# Altium PCB USBINFRTransiever.PcbDoc
Units mm, origin at the board's own origin, x right, y up, seen from the top; angles counter-clockwise.
Board outline 50 x 41 mm, 2 copper layers (Top Signal Layer, Bottom Signal Layer), stack 1.571 mm thick; 49 components, 29 nets, 145 pads, 55 vias.
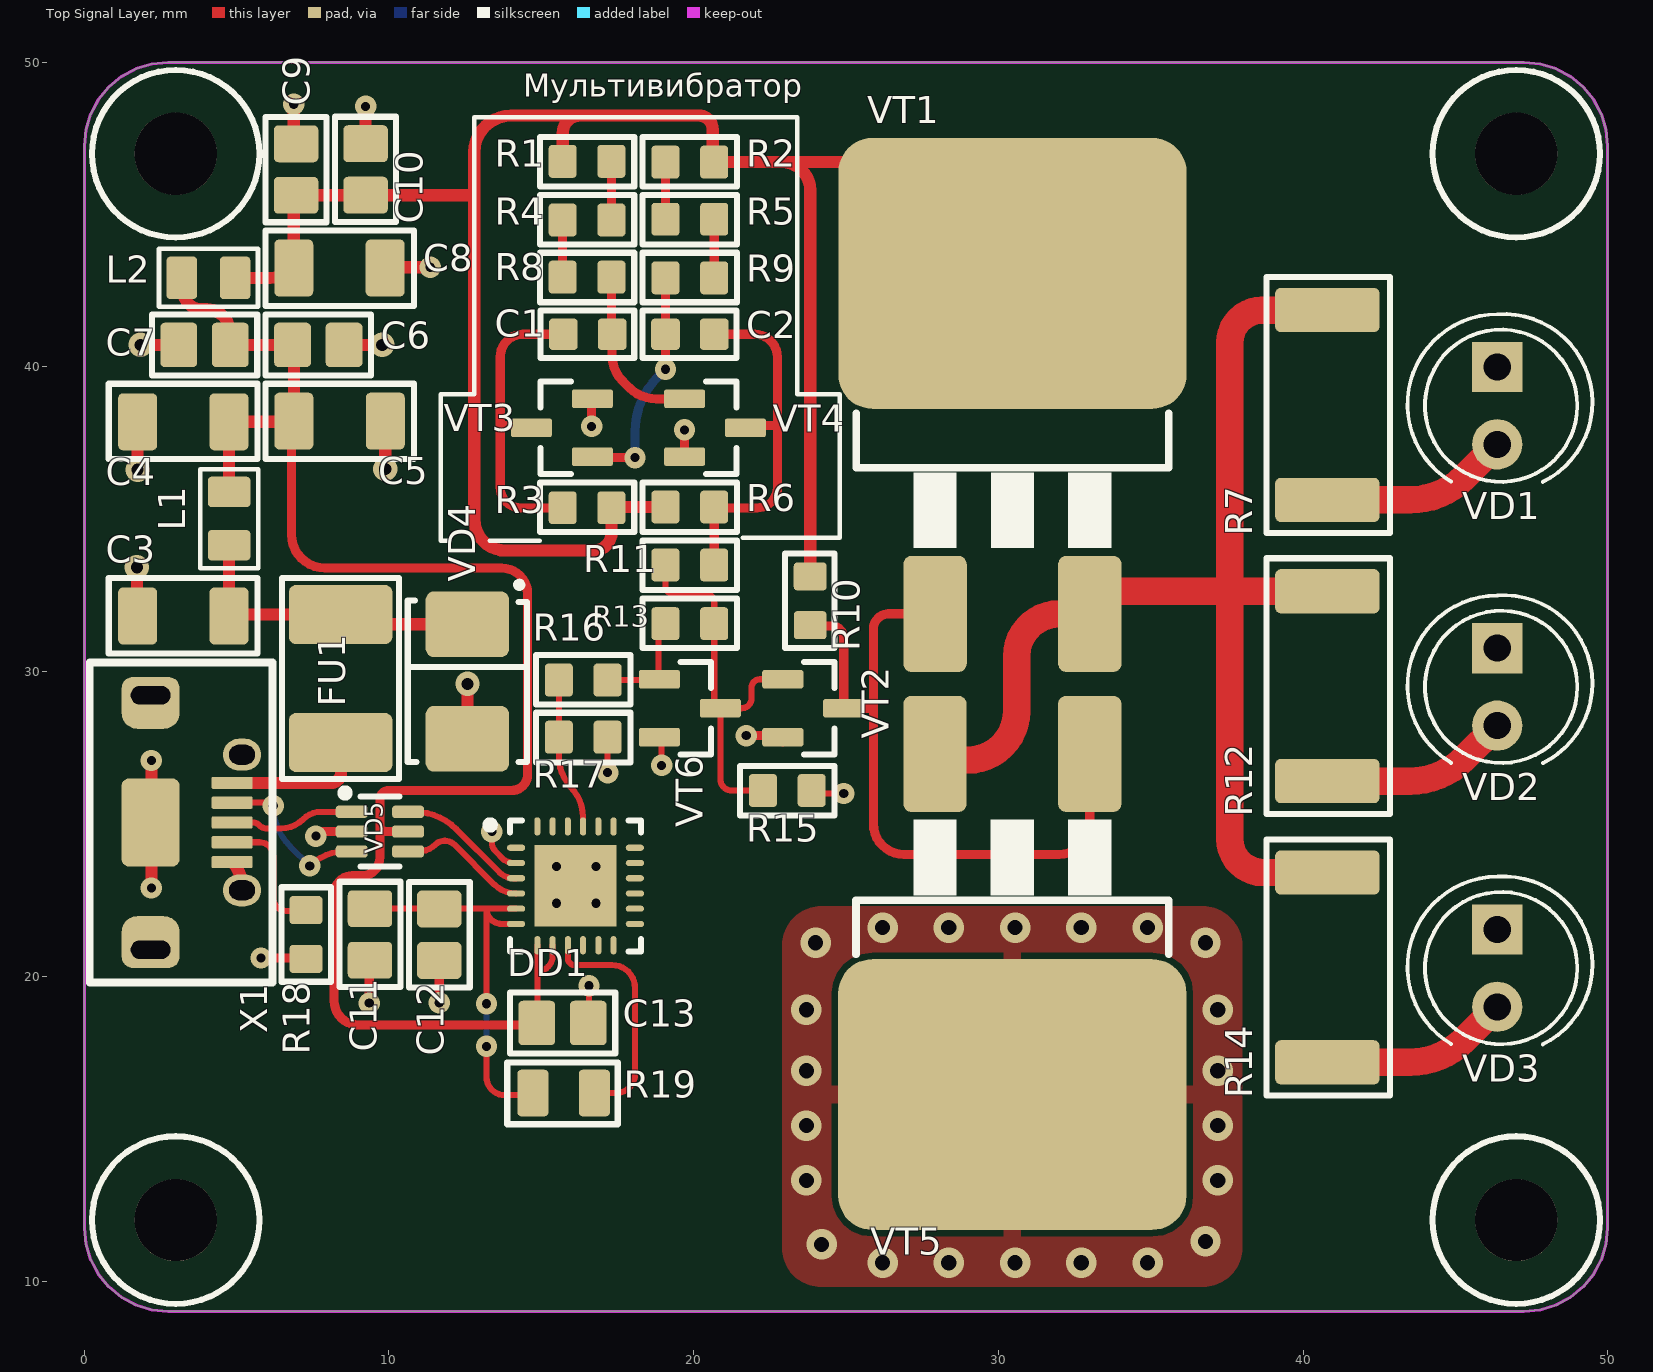
[diagram p0: Top Signal Layer view]
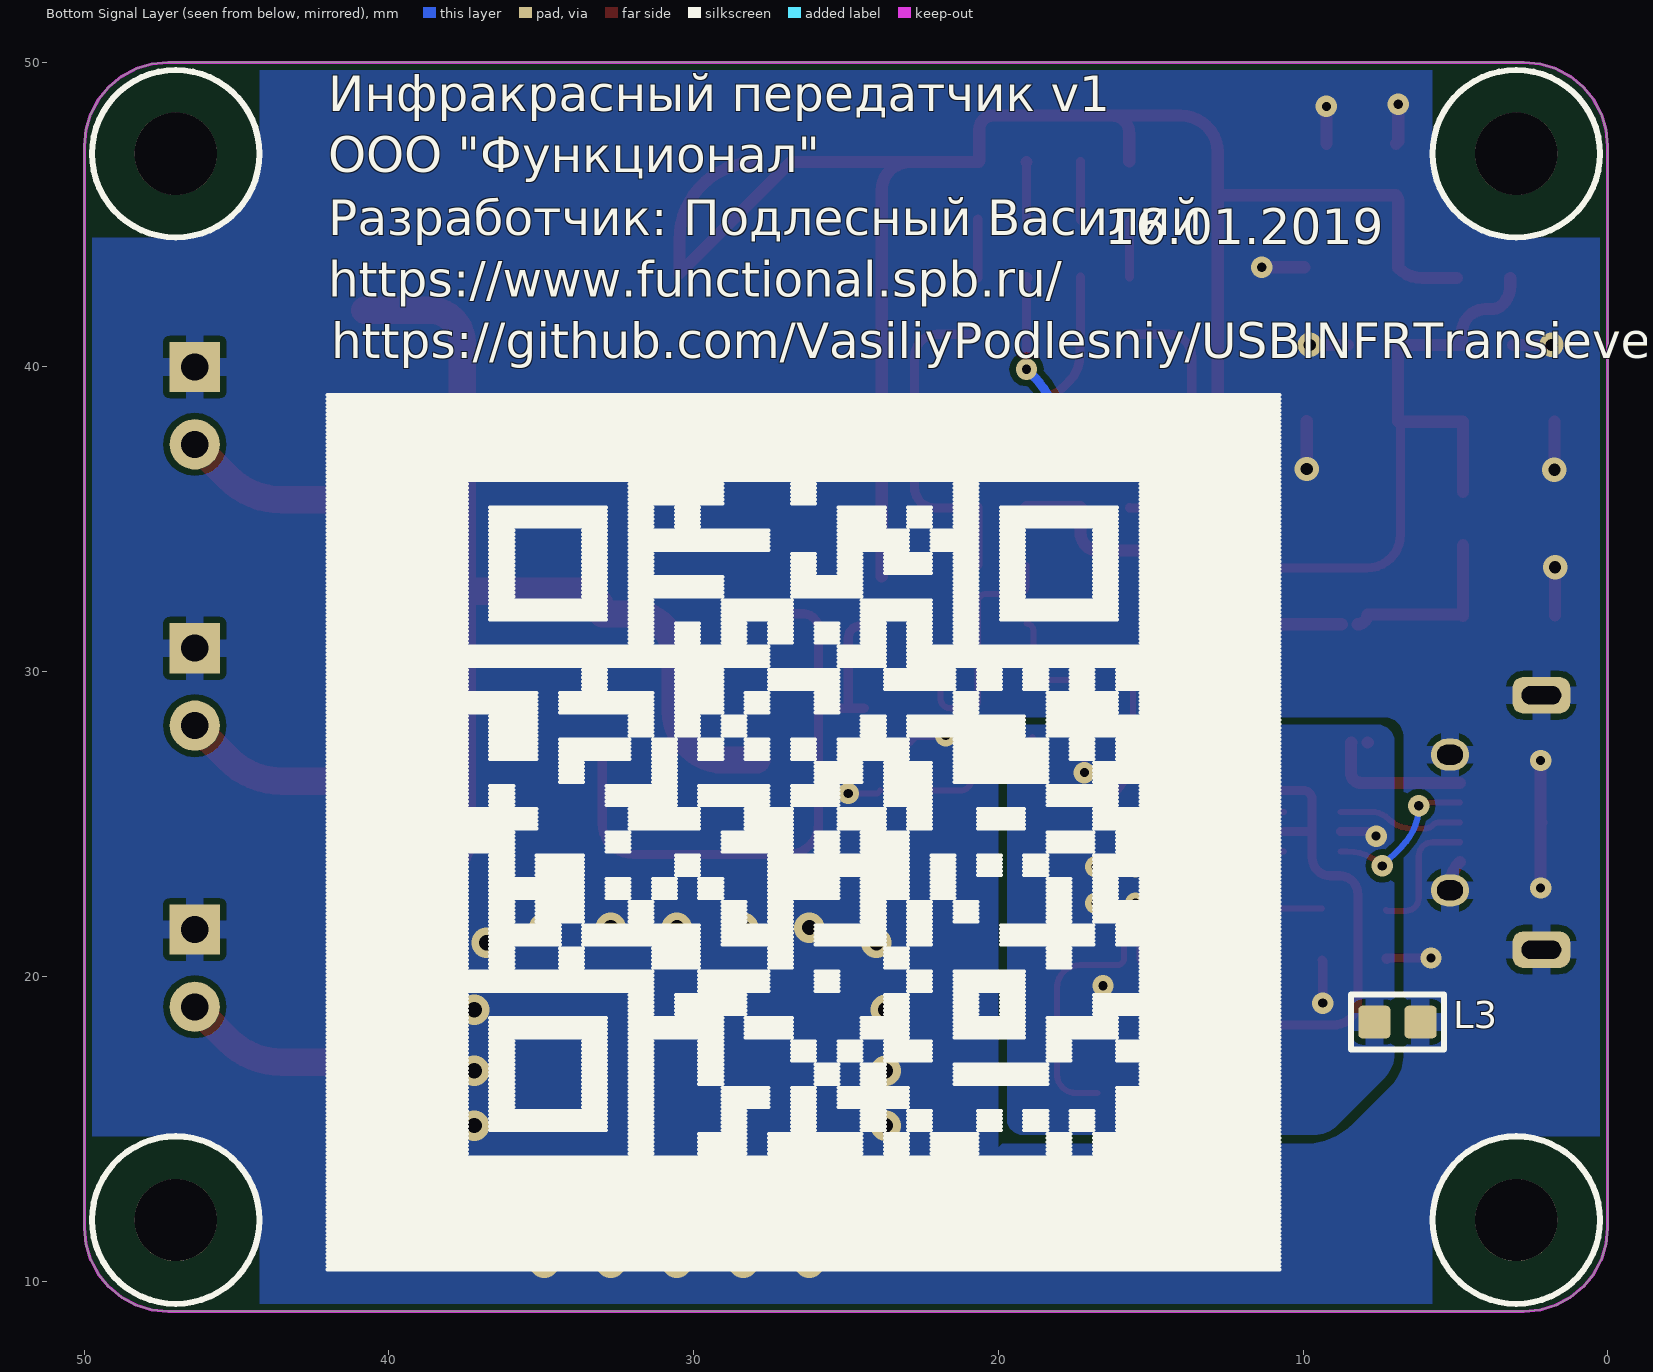
[diagram p1: Bottom Signal Layer view, seen from below]
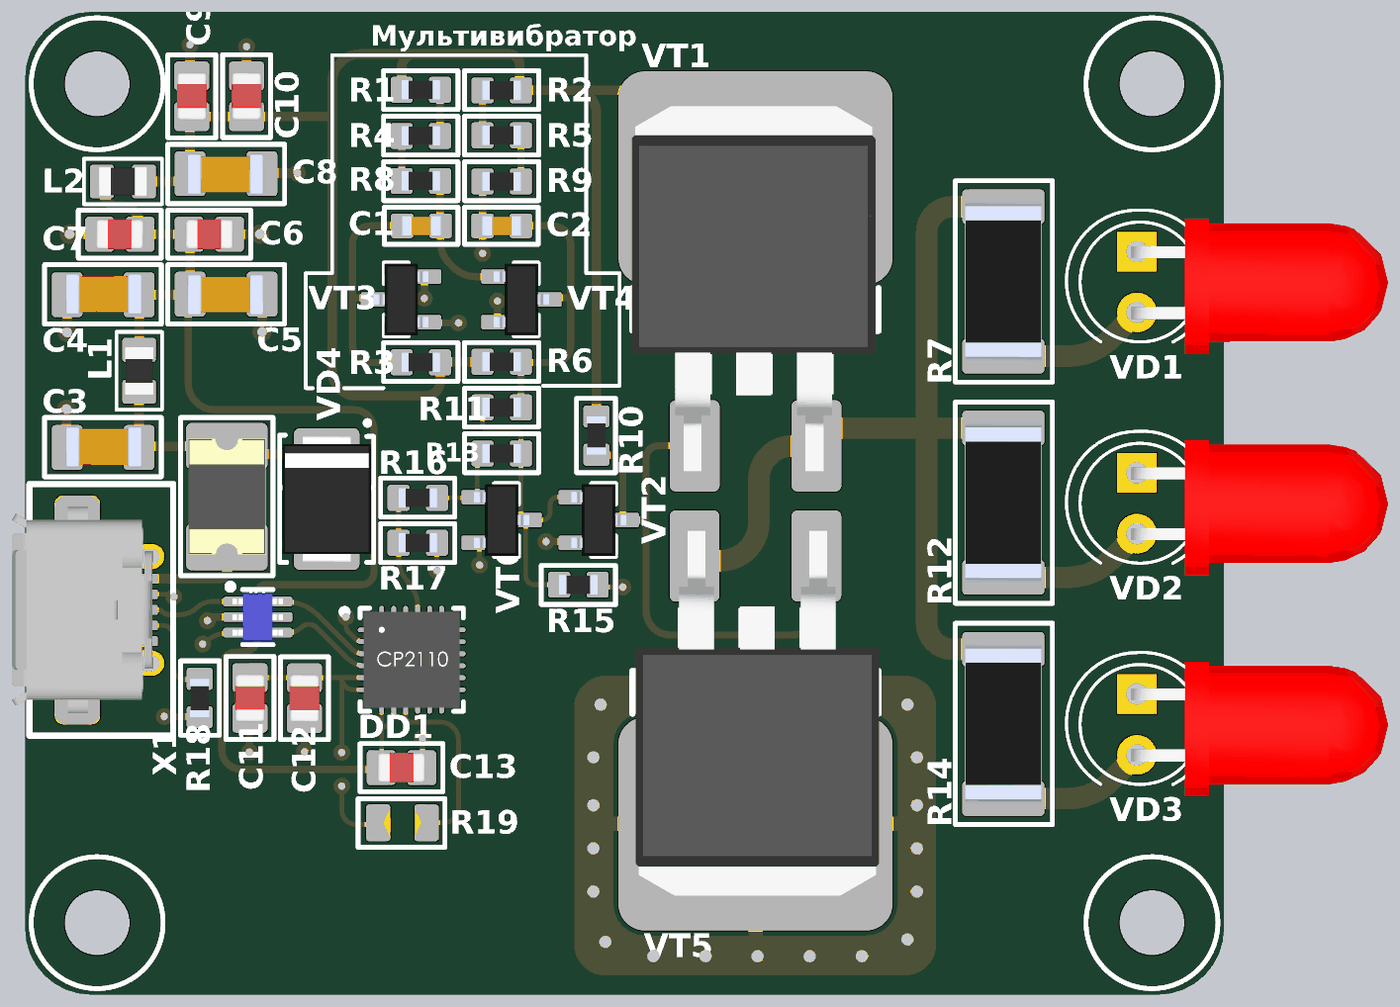
[diagram p2: 3D render of the assembled board from above, using the file's embedded part models]

## Layer stack, top to bottom
Top Solder: solder mask 0.0102, Solder Resist, Dk 3.5
Top Signal Layer: signal copper 0.0356
Dielectric 1: core 1.5, FR-4, Dk 4.2
Bottom Signal Layer: signal copper 0.0356
Bottom Solder: solder mask 0.0102, Solder Resist, Dk 3.5

## Board outline
0.209,10.698 0.053,11.213 0,11.75 0,47.25 0.053,47.786 0.209,48.302 0.463,48.778 0.805,49.195 1.222,49.537 1.698,49.791 2.213,49.947 2.75,50 47.25,50 47.786,49.947 48.302,49.791 48.778,49.537 49.195,49.195 49.537,48.778 49.791,48.302 49.947,47.786 50,47.25 50,11.75 49.947,11.213 49.791,10.698 49.537,10.222 49.195,9.805 48.778,9.463 48.302,9.209 47.786,9.053 47.25,9 2.75,9 2.213,9.053 1.698,9.209 1.222,9.463 0.805,9.805 0.463,10.222

## Design rules (kind name [scope] priority, off if disabled: settings)
Clearance Clearance_tracks_inner [OnLayer('Power Layer') OR OnLayer('Ground Layer')] p1: gap=0.35 ignorepadtopadclearanceinfootprint=FALSE except(0: Arc-Hole Track-Hole SMDPad-Hole THPad-Hole Via-Hole Fill-Hole Poly-Hole Region-Hole Text-Hole) // Зазоры между проводниками на внутренних слоях
Clearance Clearance_VccGnd [InNet('3,3ВD') vs InNet('DGND')] p2: gap=0.2 ignorepadtopadclearanceinfootprint=FALSE except(0: Arc-Hole Track-Hole SMDPad-Hole THPad-Hole Via-Hole Fill-Hole Poly-Hole Region-Hole Text-Hole; 0.4: THPad-Poly)
Clearance Clearance_VccGnd_1 [InNet('NetVD9_1') vs InNet('DGND')] p3: gap=0.2 ignorepadtopadclearanceinfootprint=FALSE except(0: Arc-Hole Track-Hole SMDPad-Hole THPad-Hole Via-Hole Fill-Hole Poly-Hole Region-Hole Text-Hole; 0.4: THPad-Poly)
Clearance Clearance_VccGnd_2 [InNet('NetVD2_2') vs InNet('DGND')] p4: gap=0.2 ignorepadtopadclearanceinfootprint=FALSE except(0: Arc-Hole Track-Hole SMDPad-Hole THPad-Hole Via-Hole Fill-Hole Poly-Hole Region-Hole Text-Hole; 0.4: THPad-Poly)
Clearance Clearance_VccGnd_5 [InNet('NetVD8_1') vs InNet('DGND')] p5: gap=0.2 ignorepadtopadclearanceinfootprint=FALSE except(0: Arc-Hole Track-Hole SMDPad-Hole THPad-Hole Via-Hole Fill-Hole Poly-Hole Region-Hole Text-Hole; 0.4: THPad-Poly)
Clearance Clearance_VccGnd_3 [InNet('NetVD10_1') vs InNet('DGND')] p6: gap=0.2 ignorepadtopadclearanceinfootprint=FALSE except(0: Arc-Hole Track-Hole SMDPad-Hole THPad-Hole Via-Hole Fill-Hole Poly-Hole Region-Hole Text-Hole; 0.4: THPad-Poly)
Clearance Clearance_VccGnd_4 [InNet('NetVD11_1') vs InNet('DGND')] p7: gap=0.2 ignorepadtopadclearanceinfootprint=FALSE except(0: Arc-Hole Track-Hole SMDPad-Hole THPad-Hole Via-Hole Fill-Hole Poly-Hole Region-Hole Text-Hole; 0.4: THPad-Poly)
Clearance Clearance_VccANGnd [InNet('3,3ВA') vs InNet('AGND')] p8: gap=0.2 ignorepadtopadclearanceinfootprint=FALSE except(0: Arc-Hole Track-Hole SMDPad-Hole THPad-Hole Via-Hole Fill-Hole Poly-Hole Region-Hole Text-Hole; 0.4: THPad-Poly)
Clearance [All] p9: gap=0.2 ignorepadtopadclearanceinfootprint=FALSE except(0: Arc-Hole Track-Hole SMDPad-Hole THPad-Hole Via-Hole Fill-Hole Poly-Hole Region-Hole Text-Hole)
ComponentClearance [All] p1: gap=0.001 collisioncheckmode=3 verticalgap=0 showdistances=FALSE
DiffPairsRouting [All] p1: maxlimit=0.254 minlimit=0.2 mostfreqgap=0.2 toplayer_minwidth=0.2 toplayer_maxwidth=0.381 toplayer_prefwidth=0.2 bottomlayer_minwidth=0.2 bottomlayer_maxwidth=0.381 bottomlayer_prefwidth=0.2 maxuncoupledlength=12.7
Height [All] p1: minheight=0 maxheight=100 prefheight=12.7
HoleSize [All] p1: absolutevalues=TRUE maxlimit=10 minlimit=0.3 maxpercent=80.000 minpercent=20.000
MinimumSolderMaskSliver [All] p1: minsoldermaskwidth=0.1
PolygonConnect PolygonConnect_Via [IsVia] p1: connectstyle=Direct reliefconductorwidth=0.254 reliefentries=4 polygonreliefangle="90 Angle" airgapwidth=0.2
PolygonConnect PolygonConnect_PGND [InNet('PGND') vs HasFootprint('USB-B Micro') And OnLayer('Top Signal Layer')] p2: connectstyle=Relief reliefconductorwidth=1 reliefentries=4 polygonreliefangle="90 Angle" airgapwidth=0.1
PolygonConnect [All] p3: connectstyle=Relief reliefconductorwidth=0.6 reliefentries=4 polygonreliefangle="90 Angle" airgapwidth=0.2
RoutingVias [All] p1: holewidth=0.711 width=1.27 viastyle="Through Hole" minholewidth=0.711 minwidth=1.27 maxholewidth=0.711 maxwidth=1.27
ShortCircuit ShortCircuit_ANALOG [InNet('3,3В') vs InNet('3,3ВA')] p1: allowed=TRUE
ShortCircuit [All] p2: allowed=FALSE
SilkToSilkClearance [All] p1: silktosilkclearance=0
SilkToSolderMaskClearance [IsPad] p1: minsilkscreentomaskgap=0 clearancetoexposedcopper=TRUE
SolderMaskExpansion [All] p1: expansion=0.05
Width [All] p1: maxlimit=4 minlimit=0.2 preferedwidth=0.2
Width 3,3В [InNet('3,3В')] p2: maxlimit=2 minlimit=0.2 preferedwidth=1
Width 24В [InNet('24В')] p3: maxlimit=4 minlimit=0.2 preferedwidth=4
Width 5В [InNet('5В')] p4: maxlimit=3 minlimit=0.2 preferedwidth=3
22 further rules are at their usual default settings.

## Classes and differential pairs
component class USBINFRTransiever_USBUART: C11 C12 C13 DD1 R19
component class USBINFRTransiever_Photodiod: C1 C2 R1 R2 R3 R4 R5 R6 R7 R8 R9 R10 R11 R12 R13 R14 R15 R16 R17 R? VD1 VD2 VD3 VT1 VT2 VT3 VT4 VT5 VT6
component class USBINFRTransiever_Power: C3 C4 C5 C6 C7 C8 C9 C10 C21 FU1 L1 L2 L3 R18 VD4 VD5 X1
differential pair class USB: NetDD1_NETDD1
differential pair NetDD1_NETDD1: +NetDD1_3 -NetDD1_4

## Components (designator, comment, footprint, x,y, rotation, side; value= is the part's Value field where it differs from the comment)
C1 "Capacitor" C0603 16.525,41.075 r0 top value=330
C2 "Capacitor" C0603 19.875,41.075 r0 top value=330
C3 "Capacitor" C1206 3.278,31.85 r0 top value=10мк
C4 "Capacitor" C1206 3.278,38.225 r0 top value=10мк
C5 "Capacitor" C1206 8.35,38.2 r180 top value=10мк
C6 "Capacitor" C0805 7.68,40.725 r180 top value=4,7мк
C7 "Capacitor" C0805 3.945,40.725 r0 top value=0,1мк
C8 "Capacitor" C1206 8.347,43.226 r180 top value=10мк
C9 "Capacitor" C0805 6.95,46.48 r270 top value=0,1мк
C10 "Capacitor" C0805 9.232,46.485 r270 top value=0,1мк
C11 "Capacitor" C0805 9.375,21.375 r90 top value=4,7мк
C12 "Capacitor" C0805 11.65,21.365 r90 top value=0,1мк
C13 "Capacitor" C0805 15.695,18.47 r0 top value=1мк
DD1 "CP2102N-A01-GQFN24" QFN24 16.12,22.97 r0 top
FU1 "Fuse" FUSE812 8.41,29.775 r90 top
L1 "Inductor" L0805 4.753,35.025 r90 top value=20мГн
L2 "Inductor" L0805 4.075,42.925 r0 top value=20мГн
L3 "Inductor" L0603 6.9,18.5 r0 bottom
R1 "Resistor_0,062Вт" R0603 16.5,46.75 r180 top value=39к
R2 "Resistor_0,062Вт" R0603 19.875,46.725 r0 top value=39к
R3 "Resistor_0,062Вт" R0603 16.5,35.38 r0 top value=1,6к
R4 "Resistor_0,062Вт" R0603 16.5,44.825 r0 top value=845
R5 "Resistor_0,062Вт" R0603 19.875,44.85 r180 top value=845
R6 "Resistor_0,062Вт" R0603 19.875,35.405 r180 top value=1,6к
R7 "Resistor_1Вт" R2512 40.8,38.753 r270 top value=33
R8 "Resistor_0,062Вт" R0603 16.5,42.95 r180 top value=27
R9 "Resistor_0,062Вт" R0603 19.875,42.925 r0 top value=27
R10 "Resistor_0,062Вт" R0603 23.825,32.325 r90 top value=1к
R11 "Resistor_0,062Вт" R0603 19.875,33.5 r180 top value=220
R12 "Resistor_1Вт" R2512 40.8,29.523 r270 top value=33
R13 "Resistor_0,062Вт" R0603 19.875,31.575 r0 top value=10к
R14 "Resistor_1Вт" R2512 40.8,20.293 r270 top value=33
R15 "Resistor_0,062Вт" R0603 23.075,26.1 r180 top value=10к
R16 "Resistor_0,062Вт" R0603 16.375,29.725 r0 top value=47
R17 "Resistor_0,062Вт" R0603 16.375,27.85 r180 top value=10к
R18 "Resistor_0,062Вт" R0603 7.275,21.373 r270 top value=100к
R19 "Resistor_0,125Вт" R0805 15.733,16.17 r180 top value=10к
VD1 "LED" RADIAL_5MM 46.375,38.73 r270 top
VD2 "LED" RADIAL_5MM 46.375,29.5 r270 top
VD3 "LED" RADIAL_5MM 46.375,20.27 r270 top
VD4 "DiodeZener" SMB 12.575,29.675 r270 top
VD5 "USBUF" SOT323-6L 9.7,24.75 r0 top
VT1 "P-MOSFET" D2PAK 30.464,42.053 r0 top
VT2 "N-MOSFET" SOT23-3 23.925,28.8 r0 top
VT3 "BJT NPN" SOT23-3 15.675,38.005 r180 top
VT4 "BJT NPN" SOT23-3 20.7,38.005 r0 top
VT5 "N-MOSFET" D2PAK 30.46,17.14 r180 top
VT6 "P-MOSFET" SOT23-3 19.875,28.8 r0 top
X1 "USB MICRO" 47590-0001 2.176,25.05 r0 top

## Footprints (in the part's own frame and the unit in brackets; to place one, negate y for a bottom-side part, rotate by r counter-clockwise, add the part's x,y. Pads: shape width x height; smd on the part's side, far side on the other; paste and mask are expansions set on the pad)
47590-0001 [mm]
  rrect25% 1.35x0.4 smd: 1(2.675,1.3) 2(2.675,0.65) 3(2.675,0) 4(2.675,-0.65) 5(2.675,-1.3)
  rrect60% 1.9x1.7 smd: 6(0,-3.925) 6(0,3.925)
  rrect25% 1.9x2.9 smd: 6(0,0)
  rrect60% 1.9x1.2 hole 0.6 slot 1.3 at 0 deg: 6(0,4.175) 6(0,-4.175)
  oval 1.25x1.05 hole 0.65 slot 0.85 at 0 deg: 6(3,-2.225) 6(3,2.225)
  silkscreen extent -2,-5.25 4,5.25, body extent -2.72,-4.32 3.18,4.33, height 2.73
C0603 [mm]
  rrect25% 0.94x1.03 smd: 1(-0.8,0) 2(0.8,0)
  silkscreen extent -1.55,-0.77 1.53,0.78, body extent -0.8,-0.4 0.8,0.4, height 0.9
C0805 [mm]
  rrect25% 1.21x1.46 smd paste-5: 1(-0.845,0) 2(0.845,0)
  silkscreen extent -1.73,-1 1.73,1, body extent -1,-0.62 1,0.63, height 0.78
C1206 [mm]
  rrect25% 1.28x1.87 smd: 1(-1.528,-0.024) 2(1.472,-0.024)
  silkscreen extent -2.47,-1.25 2.4,1.23, body extent -1.6,-0.85 1.6,0.85, height 1.75
D2PAK [mm]
  rrect25% 2.08x3.81 smd: 1(-2.54,-10.16) 3(2.54,-10.16)
  rrect25% 11.43x8.89 smd: 2(0,1.02)
  silkscreen extent -5.13,-8 5.13,-3.58, body extent -5.16,-11.25 5,4.01, height 5.03
FUSE812 [mm] "Самовосстанавливающийся предохранитель"
  rrect25% 1.95x3.4 smd: 1(-2.1,0) 2(2.1,0)
  silkscreen extent -3.3,-1.93 3.3,1.93, body extent -2.41,-1.61 2.41,1.61, height 1.32
L0603 [mm]
  rrect25% 1.05x1.07 smd paste-5: 1(-0.76,0) 2(0.76,0)
  silkscreen extent -1.53,-0.9 1.53,0.9, body extent -0.8,-0.4 0.8,0.4, height 0.8
L0805 [mm]
  rrect25% 1x1.4 smd: 1(-0.875,0) 2(0.875,0)
  silkscreen extent -1.63,-0.95 1.63,0.95, body extent -1,-0.6 1,0.6, height 0.95
QFN24 [mm]
  oval 0.6x0.2 smd: 1(-1.95,1.25) 2(-1.95,0.75) 3(-1.95,0.25) 4(-1.95,-0.25) 5(-1.95,-0.75) 6(-1.95,-1.25) 13(1.95,-1.25) 14(1.95,-0.75) 15(1.95,-0.25) 16(1.95,0.25) 17(1.95,0.75) 18(1.95,1.25)
  rect 2.68x2.68 smd: 2(0,0)
  oval 0.2x0.6 smd: 7(-1.25,-1.95) 8(-0.75,-1.95) 9(-0.25,-1.95) 10(0.25,-1.95) 11(0.75,-1.95) 12(1.25,-1.95) 19(1.25,1.95) 20(0.75,1.95) 21(0.25,1.95) 22(-0.25,1.95) 23(-0.75,1.95) 24(-1.25,1.95)
  silkscreen extent -2.92,-2.15 2.15,2.15, body extent -2,-2 2,2, height 0.75
R0603 [mm]
  rrect25% 0.92x1.08 smd: 1(-0.8,0) 2(0.8,0)
  silkscreen extent -1.55,-0.8 1.55,0.83, body extent -0.8,-0.4 0.8,0.4, height 0.5
R0805 [mm] "Chip Resistor, 2-Leads, Body 2,10x1,30mm, IPC Medium Density"
  rrect25% 1.02x1.53 smd paste-5: 1(-1.007,0) 2(1.007,0)
  silkscreen extent -1.78,-1 1.85,1.02, body extent -1.1,-0.7 1.1,0.7, height 0.55
R2512 [mm]
  rrect25% 1.45x3.43 smd: 1(-3.115,0) 2(3.115,0)
  silkscreen extent -4.2,-2 4.2,2.05, body extent -3.35,-1.6 3.35,1.6, height 0.55
RADIAL_5MM [mil]
  rect 65x65 hole 35: 1(-50,0)
  round 65 hole 35: 2(50,0)
  silkscreen extent -118,-116 99,123, body extent -103,-10 119,412, height 256
SMB [mm]
  rrect25% 2.159x2.743 smd: 1(-1.88,0) 2(1.88,0)
  silkscreen extent -3.27,-1.96 2.64,1.96, body extent -2.65,-1.85 2.65,1.85, height 2.24
SOT23-3 [mm]
  rrect25% 1.35x0.61 smd: 1(-1,0.95) 2(-1,-0.95) 3(1,0)
  silkscreen extent -0.3,-1.52 0.7,1.52, body extent -1.15,-1.5 1.15,1.5, height 1.1
SOT323-6L [mm]
  rrect50% 1.05x0.4 smd: 1(-0.925,0.65) 2(-0.925,0) 3(-0.925,-0.65) 4(0.925,-0.65) 5(0.925,0) 6(0.925,0.65)
  silkscreen extent -1.27,-1.15 0.64,1.39, body extent -1.05,-1 1.05,1, height 0.93

## Part data
C1 C2: library part cap215, "Конденсатор", Manufacture=Murata, Part Name=Ceramic, Part Number=GRM188R71H331KA01D, Voltage=50В, id=cap215, TKE=X7R
C3 C4 C5 C8: library part cap187, "Конденсатор", Manufacture=Murata, Part Name=Ceramic, Part Number=GRM31CR71E106KA12L*, Voltage=25В, id=cap187, TKE=X7R
C6 C11: library part cap154, "Конденсатор", Manufacture=Murata, Part Name=Ceramic, Part Number=GRM21BR61E475KA12L, Voltage=25B, id=cap154, TKE=X5R
C7 C9 C10 C12: library part cap142, "Конденсатор", Manufacture=Murata, Part Name=Ceramic, Part Number=GRM21BR71H104K**, Voltage=50B, id=cap142, TKE=X7R
C13: library part cap152, "Конденсатор", Manufacture=Murata, Part Name=Ceramic, Part Number=GRM21BR71H105K, Voltage=50B, id=cap152, TKE=X7R
DD1: library part interf18, "USB-UART преобразователь", Current Consumption=1,3mA...10mA, Manufacture="Silicon Laboratories", Part Name="USB - UART", Power Supply=3-3.6V, id=interf18, Part Number=CP2102N-A01-GQFN24, Type Supply="Single Polar"
FU1: library part fuse8, "Предохранитель", Manufacture=Bourns, Part Name="Resettable Fuses", Part Number=MF-MSMF050, Resistance=0,15Ohms, id=fuse8, I hold=0,5A, I max=100A, I trip=1A, V max=15B
L1 L2: library part ind69, "EMI Suppression Filter", Manufacture=Murata, Part Name="EMI Inductor", Part Number=BLM21PG221SN1D, Rated Current=2А, Resistance=0,05Ohm, id=ind69
L3: library part ind0, "EMI Suppression Filter", Part Name="EMI Suppression Filters", Part Number=BLM18PG181SN1D, Rated Current=1,5A, Resistance=0,09Ohm, id=ind0
R1 R2: library part res497, "Резистор", Manufacture=Yageo, Part Name=Resistor, Part Number=RC0603FR-0739KL, Power=0,062Вт, Accuracy=1%, id=res497
R3 R6: library part res464, "Резистор", Manufacture=Yageo, Part Name=Resistor, Part Number=RC0603FR-071K6, Power=0,062Вт, Accuracy=1%, id=res464
R4 R5: library part res971, "Резистор", Manufacture=Yageo, Part Name=Resistor, Part Number=RC0603FR-07845RL, Power=0,062Вт, id=res971
R7 R12 R14: library part res809, "Резистор", Manufacture=Yageo, Part Name=Resistor, Part Number=RC2512FR-0733RL, Power=1Вт, Accuracy=1%, id=res809
R8 R9: library part res421, "Резистор", Manufacture=Yageo, Part Name=Resistor, Part Number=RC0603FR-0727RL, Power=0,062Вт, Accuracy=1%, id=res421
R10: library part res459, "Резистор", Manufacture=Yageo, Part Name=Resistor, Part Number=RC0603FR-071KL, Power=0,062Вт, Accuracy=1%, id=res459
R11: library part res443, "Резистор", Manufacture=Yageo, Part Name=Resistor, Part Number=RC0603FR-07220RL, Power=0,062Вт, Accuracy=1%, id=res443
R13 R15 R17: library part res483, "Резистор", Manufacture=Yageo, Part Name=Resistor, Part Number=RC0603FR-0710KL, Power=0,062Вт, Accuracy=1%, id=res483
R16: library part res427, "Резистор", Manufacture=Yageo, Part Name=Resistor, Part Number=RC0603FR-0747RL, Power=0,062Вт, Accuracy=1%, id=res427
R18: library part res507, "Резистор", Manufacture=Yageo, Part Name=Resistor, Part Number=RC0603FR-07100KL, Power=0,062Вт, Accuracy=1%, id=res507
R19: library part res97, "Резистор", Manufacture=Yageo, Part Name=Resistor, Part Number=RC0805FR-0710KL, Power=0,125Вт, Accuracy=1%, id=res97
VD1 VD2 VD3: library part phdiode1, "Светодиод", Forward Current=100mA, Forward Voltage=1,35-2,6B, Manufacture=Vishay, Max Reverse Voltage=5B, Part Name="High Power Infrared Emitting Diode", Part Number=TSAL6100, Radiant power=35mW, Surge Forward Current="1,5A(impulse - 100us)", Angle of half intensity=(+-)10, id=phdiode1, Number of Channels=1, Peak wavelength=940nm, Radiant intensity=80-400,1450mW/sr
VD4: library part SMBJ5.A, "Cтабилитрон (лавинный выпрямительный диод) односторонний", Breakdown Voltage=6,74B, Clamping voltage=9,2B, Dynamic resistance=0,031Ohm, Leakage Current=20uA, Manufacture="ST Microelectronics", Part Name="TVS diode Unidirectional", Peak Pulse Power=600W, Stand-off Voltage=5B, id=tvs68, Number of diodes=1, Part Number=SMBJ5.A
VD5: library part diode14, "EMEMI filter and line termination for USB upstream ports", Capacitance=47pF, Manufacture="ST Microelectronics", Part Name="EMI filter for USB upstream ports", Part Number=USBUF02W6, id=diode14, Number of Channels=2
VT1: library part trans6, "N-MOSFET", Continuous drain current=(-23)A, Gate-to-source voltage=(+-)20B, Manufacturer="International Rectifier", Part Name=Transistor, Part Number=IRF9540NSPBF, Power dissipation=140W, Pulsed drain current=(-92)A, id=trans6, Rds=0,117Ohm, Structure=p-channel, V drain-source max=(-100B)
VT2: library part trans2, Continuous drain current=1,2A, Gate-to-source voltage=(+-)12B, Manufacturer="International Rectifier", Part Name=Transistor, Part Number=IRLML2402TRPBF, Power dissipation=0,54W, Pulsed drain current=7,4A, id=trans2, Rds=0,25Ohm, Structure=n-channel, V drain-source max=20B
VT3 VT4: library part bjt5, Frequency=100МГц, Manufacture="NXP Semiconductor", Part Name=Transistor, Part Number=PBSS4350T.215, Power=0,48Вт, hfe=300, Ic max=2А, id=bjt5, Structure=npn, Vceo max=50В
VT5: library part trans7, Continuous drain current=33A, Gate-to-source voltage=(+-)20B, Manufacturer="International Rectifier", Part Name=Transistor, Part Number=IRF540NSPBF, Power dissipation=130W, Pulsed drain current=110A, id=trans7, Rds=0,044Ohm, Structure=n-channel, V drain-source max=100B
VT6: library part trans5, "N-MOSFET", Continuous drain current=(-4,3)A, Gate-to-source voltage=(+-)12B, Manufacturer="International Rectifier", Part Name=Transistor, Part Number=IRLML2244TRPbF, Power dissipation=1,3W, Pulsed drain current=(-18)A, id=trans5, Rds=0,054Ohm, Structure=p-channel, V drain-source max=(-20B)
X1: library part connect47, Manufacture1=Molex, Part Name="Micro-USB AB Receptacle", Contact_1=VCC, Contact_2=D-, Contact_3=D+, Contact_4=ID, Contact_5=GND, Contact_6=Shell, id=connect47

## Free pads (board coordinates)
  round 2.7 hole 2.7 unplated: ""(3,12) ""(3,47) ""(47,12) ""(47,47)

## Via types
v1: diameter 0.7, hole 0.3, Top Signal Layer to Bottom Signal Layer, tented both sides, 23 vias
v2: diameter 1, hole 0.5, Top Signal Layer to Bottom Signal Layer, tented both sides, 22 vias
v3: diameter 0.8, hole 0.4, Top Signal Layer to Bottom Signal Layer, tented both sides, 6 vias
v4: diameter 0.7, hole 0.3, Top Signal Layer to Bottom Signal Layer, tented bottom, 4 vias

## Nets (pads, with @x,y where several pads share a name; then routed paths per layer and width w, separated by ;. In a path a pad name is that pad's centre, name@x,y a point inside that pad or via, vN(x,y) a via of type N, cw(c..) or ccw(c..) an arc to the next point about the centre after c; other vN are vias at no path point)
5В: C4.2 C5.2 C6.2 C7.2 C13.1 DD1.7 DD1.8 L1.2 L2.1 VD5.5 | length 55.4
  Top Signal Layer w0.2: C5.2@6.8,38.146 cw(c6.855,38.146) C5.2@6.855,38.201 ; C13.1@14.78,18.4 ccw(c14.78,18.47) C13.1 ccw(c14.802,18.518) 14.87,18.518 14.87,20.17 ; DD1.7 14.87,20.17 ; DD1.8 15.37,20.67 cw(c14.87,20.67) 14.87,20.17
  Top Signal Layer w0.3: C5.2@6.8,38.146 6.8,34.5 ccw(c7.9,34.5) 7.9,33.4 13.7,33.4 cw(c13.7,32.55) 14.55,32.55 14.55,26.625 cw(c14.025,26.625) 14.025,26.1 10,26.1 ccw(c10,25.8) 9.7,25.8 9.7,24.85 ; VD5.5 9.941,24.75 cw(c9.941,25.091) 9.7,24.85 ; C13.1@14.78,18.4 9,18.4 cw(c9,19.2) 8.2,19.2 8.2,22.7 cw(c8.8,22.7) 8.8,23.3 9.1,23.3 ccw(c9.1,23.9) 9.7,23.9 9.7,24.85
  Top Signal Layer w0.4: L2.1 3.2,42.653 ccw(c4.053,42.653) 3.45,42.05 ccw(c3.812,42.412) 3.812,41.9 4.007,41.9 cw(c4.007,41.132) 4.55,41.675 cw(c3.971,41.096) 4.79,41.096 C7.2 C6.2 cw(c6.835,40.682) 6.878,40.682 C5.2 cw(c6.855,38.224) 6.855,38.201 C4.2 4.753,38.198 L1.2
5ВL: C8.2 C9.2 C10.2 L2.2 R1.2 R2.2 R3.2 R6.2 R10.2 VT1.2 | length 72.6
  Top Signal Layer w0.4: L2.2 6.09,42.925 ccw(c6.09,44.035) C8.2 6.875,45.454 cw(c7.131,45.454) C9.2 9.227,45.635 C10.2 12.8,45.64 ; R1.2 15.7,47.675 cw(c16.275,47.675) 16.275,48.25 ; R6.2 17.325,35.405 ccw(c17.325,35.38) R3.2 17.3,34.55 cw(c16.725,34.55) 16.725,33.975 13.825,33.975 cw(c13.825,35) 12.8,35 12.8,45.64 ; R10.2 23.825,45.8 ccw(c22.9,45.8) 22.9,46.725 ; VT1.2@27.924,46.725 cw(c27.924,44.185) 30.464,44.185 VT1.2 26.812,46.725 22.9,46.725 ; 12.8,45.64 12.8,47.05 cw(c14,47.05) 14,48.25 16.275,48.25 ; 16.275,48.25 20.175,48.25 cw(c20.175,47.8) 20.625,47.8 20.625,46.775 ccw(c20.675,46.775) R2.2 22.9,46.725
DGND: C11.1 C12.1 C13.2 DD1.2 L3.2 R17.1 VD5.2 VT6.2 | length 8.8
  Top Signal Layer w0.2: v1(13.375,24.75) 13.375,24.375 ccw(c13.721,24.375) 13.476,24.13 13.789,23.817 ccw(c14.145,24.42) 14.145,23.72 DD1.2@14.17,23.72 ; C13.2@16.565,18.53 v1(16.565,19.693) ; v1(17.175,26.687) R17.1 ; VT6.2 18.95,27.775 v1(18.95,26.925)
  Top Signal Layer w0.3: v1(7.6,24.601) 7.749,24.75 VD5.2 ; v1(9.35,19.12) 9.35,20.505 C11.1 ; v1(11.65,19.135) C12.1
  other v4: 15.5,22.4 16.8,22.4 15.5,23.6 16.8,23.6
NetC1_1: C1.1 R3.1 VT3.3 | length 10.3
  Top Signal Layer w0.3: VT3.3 ccw(c14.605,38.005) 14.605,38.075 13.65,38.075 ; R3.1 15.7,35.375 14.325,35.375 cw(c14.325,36.05) 13.65,36.05 13.65,38.075 ; C1.1 14.4,41.075 ccw(c14.4,40.325) 13.65,40.325 13.65,38.075
NetC1_2: C1.2 R8.1 VT4.1 | length 5.7
  Top Signal Layer w0.3: C1.2@17.3,41.075 R8.1 ; C1.2 17.325,40.377 ccw(c18.52,40.377) 17.675,39.533 17.883,39.324 ccw(c18.775,40.216) 18.775,38.955 VT4.1
NetC2_1: C2.1 R9.1 VT3.1 | length 7.6
  Top Signal Layer w0.3: VT3.1 16.705,37.025 v1(18.075,37.025) ; v1(19.075,39.925) C2.1 R9.1
  Bottom Signal Layer w0.3: v1(18.075,37.025) 18.075,37.873 cw(c20.615,37.873) 18.819,39.669 v1(19.075,39.925)
NetC2_2: C2.2 R6.1 R11.1 VT4.3 | length 12.1
  Top Signal Layer w0.3: R11.1 R6.1 ; C2.2 22,41.075 cw(c22,40.325) 22.75,40.325 22.75,38.075 ; R6.1@20.7,35.375 R6.1@20.725,35.375 ; R6.1@20.725,35.38 R6.1@20.725,35.375 ; VT4.3@21.795,38.075 22.75,38.075 ; R6.1@20.725,35.375 22.075,35.375 ccw(c22.075,36.05) 22.75,36.05 22.75,38.075
NetC3_2: C3.2 FU1.2 L1.1 VD4.1 | length 9.8
  Top Signal Layer w0.4: L1.1 4.75,34.147 C3.2 cw(c4.799,31.826) 4.799,31.875 7.885,31.875 ccw(c8.205,31.875) FU1.2@8.205,31.555 ; FU1.2@8.73,31.555 VD4.1
NetC11_2: C11.2 C12.2 DD1.5 DD1.6 R19.2 | length 13.5
  Top Signal Layer w0.2: C11.2 11.65,22.22 13.2,22.22 ; v1(13.2,17.7) 13.2,16.7 ccw(c13.8,16.7) 13.8,16.1 14.655,16.1 ccw(c14.655,16.17) R19.2 ; v1(13.2,19.1) 13.2,22.22 ; DD1.6 13.7,21.72 cw(c13.7,22.22) 13.2,22.22 ; DD1.5 13.2,22.22
  Bottom Signal Layer w0.2: v1(13.2,17.7) v1(13.2,19.1)
NetDD1_3: DD1.3 VD5.6 | length 4.3
  Top Signal Layer w0.2: VD5.6 10.839,25.4 cw(c10.839,23.464) 12.208,24.833 13.633,23.408 ccw(c14.087,23.862) 14.087,23.22 DD1.3
NetDD1_4: DD1.4 VD5.4 | length 4.3
  Top Signal Layer w0.2: VD5.4 10.982,24.1 ccw(c10.982,24.868) 11.525,24.325 cw(c11.827,24.023) 11.827,24.45 11.831,24.45 cw(c11.831,23.981) 12.163,24.313 13.462,23.013 ccw(c14.17,23.722) DD1.4
NetDD1_9: DD1.9 R19.1 | length 7.7
  Top Signal Layer w0.2: DD1.9 15.87,20.6 ccw(c16.1,20.6) 16.1,20.37 17.325,20.37 cw(c17.325,19.62) 18.075,19.62 18.075,16.795 cw(c17.45,16.795) 17.45,16.17 R19.1
NetDD1_21: DD1.21 R16.1 R17.2 | length 5
  Top Signal Layer w0.2: R16.1 R17.2 15.575,27.191 ccw(c16.941,27.191) 15.975,26.225 ; 15.95,26.225 cw(c14.936,25.211) 16.37,25.225 DD1.21
NetFU1_1: FU1.1 X1.1 | length 4.8
  Top Signal Layer w0.4: X1.1 8.1,26.35 ccw(c8.1,26.675) 8.425,26.675 8.425,27.675 FU1.1 ; FU1.1@7.875,27.675 FU1.1@7.885,27.675
NetR1_1: R1.1 R4.2 | length 1.9
  Top Signal Layer w0.3: R4.2 R1.1
NetR2_1: R2.1 R5.2 | length 1.9
  Top Signal Layer w0.3: R5.2 R2.1
NetR4_1: R4.1 R8.2 | length 1.9
  Top Signal Layer w0.3: R8.2 R4.1
NetR5_1: R5.1 R9.2 | length 1.9
  Top Signal Layer w0.3: R9.2 R5.1
NetR7_1: R7.1 R12.1 R14.1 VT1.3 VT5.3 | length 40.8
  Top Signal Layer w0.9: VT5.3@27.92,27.128 ccw(c27.948,27.128) 27.948,27.1 29,27.1 ccw(c29,28.7) 30.6,28.7 30.6,30.5 cw(c31.993,30.5) 31.993,31.893 VT1.3 cw(c33.749,31.893) 33.749,32.638 37.6,32.638 ; R14.1 38.692,23.408 cw(c38.692,24.5) 37.6,24.5 37.6,32.638 ; R12.1 37.6,32.638 ; R7.1 38.668,41.868 ccw(c38.668,40.8) 37.6,40.8 37.6,32.638
NetR7_2: R7.2 VD1.2 | length 6.2
  Top Signal Layer w0.9: R7.2 43.501,35.638 ccw(c43.501,38.178) 45.297,36.382 VD1.2
NetR10_1: R10.1 VT1.1 VT2.3 VT5.1 | length 24.2
  Top Signal Layer w0.3: R10.1 ccw(c23.85,31.525) 23.85,31.5 24.525,31.5 cw(c24.525,31.1) 24.925,31.1 VT2.3 ; VT2.3@24.4,28.8 VT2.3 ; VT1.1 27.924,31.9 26.4,31.9 ccw(c26.4,31.4) 25.9,31.4 25.9,28.8 ; VT5.1@33,27.128 33,25 cw(c32,25) 32,24 26.9,24 cw(c26.9,25) 25.9,25 25.9,28.8 ; VT2.3 25.9,28.8
NetR11_2: R11.2 R13.2 R15.2 VT2.1 VT6.3 | length 12.9
  Top Signal Layer w0.2: R11.2 19.075,32.8 ccw(c19.325,32.8) 19.325,32.55 20.4,32.55 cw(c20.4,32.275) 20.675,32.275 R13.2 cw(c20.7,31.575) R13.2@20.7,31.6 ; R13.2 20.675,29 ccw(c20.875,29) VT6.3 ; R15.2 21.25,26.1 cw(c21.25,26.475) 20.875,26.475 VT6.3 ; VT2.1 22.175,29.75 ccw(c22.175,29.475) 21.9,29.475 21.9,29.125 cw(c21.575,29.125) 21.575,28.8 VT6.3
NetR12_2: R12.2 VD2.2 | length 6.2
  Top Signal Layer w0.9: R12.2 43.501,26.408 ccw(c43.501,28.948) 45.297,27.152 VD2.2
NetR13_1: R13.1 R16.2 VT6.1 | length 3.7
  Top Signal Layer w0.2: R16.2 18.85,29.725 18.85,31.35 cw(c19.075,31.35) R13.1
NetR14_2: R14.2 VD3.2 | length 6.2
  Top Signal Layer w0.9: R14.2 43.501,17.178 ccw(c43.501,19.718) 45.297,17.922 VD3.2
NetR18_1: R18.1 X1.4 | length 4.3
  Top Signal Layer w0.2: X1.4 5.75,24.4 cw(c5.75,23.95) 6.2,23.95 6.2,22.575 ccw(c6.625,22.575) 6.625,22.15 7.252,22.15 ccw(c7.252,22.173) R18.1
NetVD5_1: VD5.1 X1.3 | length 4.1
  Top Signal Layer w0.2: X1.3 5.544,25.05 cw(c5.544,24.794) 5.725,24.975 5.744,24.956 ; 5.744,24.956 ccw(c6,25.212) 6,24.85 6.451,24.85 ccw(c6.451,25.874) 7.175,25.15 cw(c7.779,24.546) 7.779,25.4 VD5.1
NetVD5_3: VD5.3 X1.2 | length 5.3
  Top Signal Layer w0.2: X1.2 5.96,25.7 cw(c5.96,25.359) v1(6.201,25.6) ; v1(7.4,23.625) cw(c8.547,22.478) 8.547,24.1 VD5.3
  Bottom Signal Layer w0.2: v1(6.201,25.6) ccw(c8.074,25.6) 6.75,24.275 v1(7.4,23.625)
PGND: C3.1 C4.1 C5.1 C6.1 C7.1 C8.1 C9.1 C10.1 L3.1 R15.1 R18.2 VD1.1 VD2.1 VD3.1 VD4.2 VT2.2 VT3.2 VT4.2 VT5.2 X1.5 X1.6 | length 24
  Top Signal Layer w0.2: R15.1 23.975,26 v1(24.925,26)
  Top Signal Layer w0.3: C3.1@1.725,31.851 C3.1 ; v1(5.8,20.6) 7.248,20.6 cw(c7.248,20.573) R18.2 ccw(c7.275,20.548) R18.2@7.25,20.548 ; v1(16.65,38.05) 16.65,38.93 VT3.2 ; VT4.2 v1(19.7,37.935) ; v1(21.725,27.9) 22.725,27.9 VT2.2@22.925,27.7
  Top Signal Layer w0.4: C3.1@1.725,31.851 v3(1.725,33.425) ; v3(1.75,36.627) C4.1 ; v3(1.845,40.725) C7.1 ; X1.6@2.176,25.05 cw(c2.118,24.992) X1.6@2.2,24.992 ; v1(2.2,22.9) X1.6@2.2,24.992 ; v1(2.2,27.084) 2.2,25.05 X1.6@2.2,24.992 ; X1.5 cw(c4.066,22.965) 5.176,22.965 X1.6@5.176,22.825 ; v1(6.875,48.625) 6.875,47.4 C9.1 ; C6.1 v3(9.78,40.725) ; C10.1 v1(9.232,48.555) ; v3(9.878,36.65) C5.1 ; C8.1@9.953,43.274 v1(11.355,43.274) ; VD4.2 v3(12.575,29.6)
  other v2: 26.2,10.6 28.375,10.6 30.55,10.6 32.725,10.6 34.9,10.6 24.2,11.2 36.8,11.3 23.7,13.3 37.2,13.3 23.7,15.1 37.2,15.1 23.7,16.9 37.2,16.9 23.7,18.9 37.2,18.9 24,21.1 36.8,21.1 26.2,21.6 28.375,21.6 30.55,21.6 32.725,21.6 34.9,21.6
pads on no net: DD1.1 DD1.10 DD1.11 DD1.12 DD1.13 DD1.14 DD1.15 DD1.16 DD1.17 DD1.18 DD1.19 DD1.20 DD1.22 DD1.23 DD1.24

## Polygon pours and split planes (outlines as drawn)
PGND on Bottom Signal Layer "Top Signal Layer-No Net" (solid, pour order 0): 0,29 0,50 50,50 50,8.9 20,9.067 20,27.839 ccw(c19.339,27.839) 19.339,28.5 7.3,28.5 ccw(c7.3,27.9) 6.7,27.9 6.7,17.383 ccw(c8.107,17.383) 7.112,16.388 8.346,15.154 ccw(c9.924,16.731) 9.924,14.5 20,14.5 20,9 6.5,9 0,9
DGND on Bottom Signal Layer "Top Signal Layer-No Net" (solid, pour order 4): 7,27.7 7,17.483 ccw(c8.166,17.483) 7.341,16.659 8.888,15.112 ccw(c9.641,15.866) 9.641,14.8 19.2,14.8 ccw(c19.2,15.3) 19.7,15.3 19.7,27.7 ccw(c19.15,27.7) 19.15,28.25 7.55,28.25 ccw(c7.55,27.7)
PGND on Top Signal Layer "Top Signal Layer-No Net" (solid, pour order 6): 22.9,21 22.9,11.1 ccw(c24.195,11.1) 24.195,9.805 36.705,9.805 ccw(c36.705,11.1) 38,11.1 38,21 ccw(c36.7,21) 36.7,22.3 24.2,22.3 ccw(c24.2,21)

## Keep-outs
Keep-Out Layer:
  the board outline again, w0.1

## Other copper
Bottom Signal Layer:
  pour cut-out: 5.75,9 5.75,12.638 5.388,13.512 4.512,14.388 3.638,14.75 0,14.75 0,9
  pour cut-out: 5.75,47.05 5.75,50 0,50 0,44.25 2.95,44.25 ccw(c2.95,47.05)
  pour cut-out: 50,14.75 47.05,14.75 ccw(c47.05,11.95) 44.25,11.95 44.25,9 50,9
  pour cut-out: 44.25,50 44.25,47.05 ccw(c47.05,47.05) 47.05,44.25 50,44.25 50,50

## Silkscreen, mask and mechanical layers (free items; w line width, h text height)
Top Overlay:
  circle w0.2: c3,47 r2.75
  circle w0.2: c47,47 r2.75
  circle w0.2: c47,12 r2.75
  circle w0.2: c3,12 r2.75
  lines w0.15: 12,34.3 11.7,34.3 11.7,39.1 12.8,39.1 12.8,48.2 23.4,48.2 23.4,39.1 24.8,39.1 24.8,34.4 21.605,34.4 ; 13.3,34.3 14.95,34.3
  text "Мультивибратор" at 14.4,48.6 h1.3
Bottom Overlay:
  drawing of 1515 lines, arcs and shapes, not listed
  text "Инфракрасный передатчик v1" at 42,48 h2
  text "ООО \"Функционал\"" at 42,45.99 h2
  text "Разработчик: Подлесный Василий" at 42,43.936 h2
  text "16.01.2019" at 16.5,43.634 h2
  text "https://www.functional.spb.ru/" at 42,41.906 h2
  text "https://github.com/VasiliyPodlesniy/USBINFRTransiever" at 41.9,39.9 h2